# EAGLE board FubarinoMini_v16_SeeedPannel (EAGLE 6.4), part 1 of 2
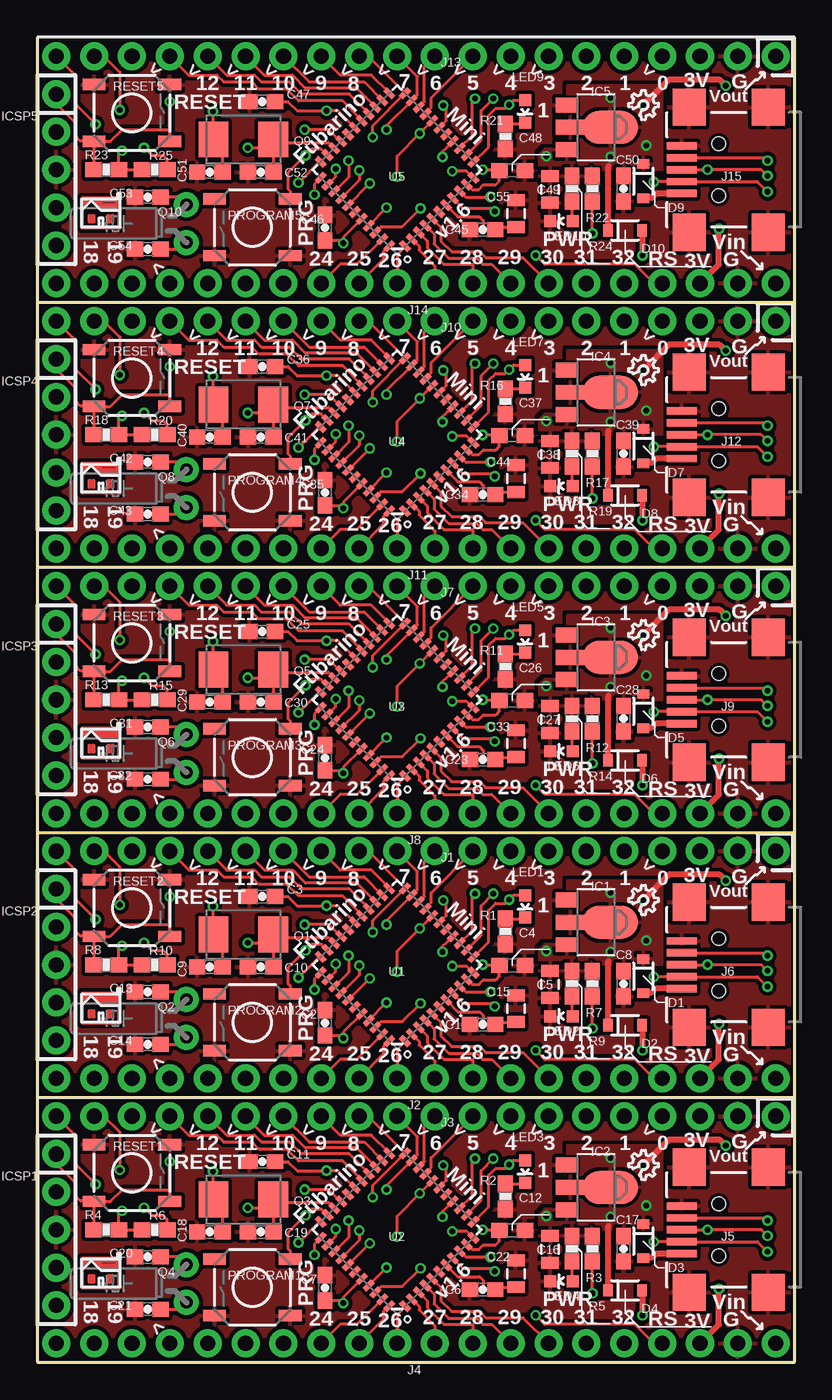
[diagram p0: board, top side]
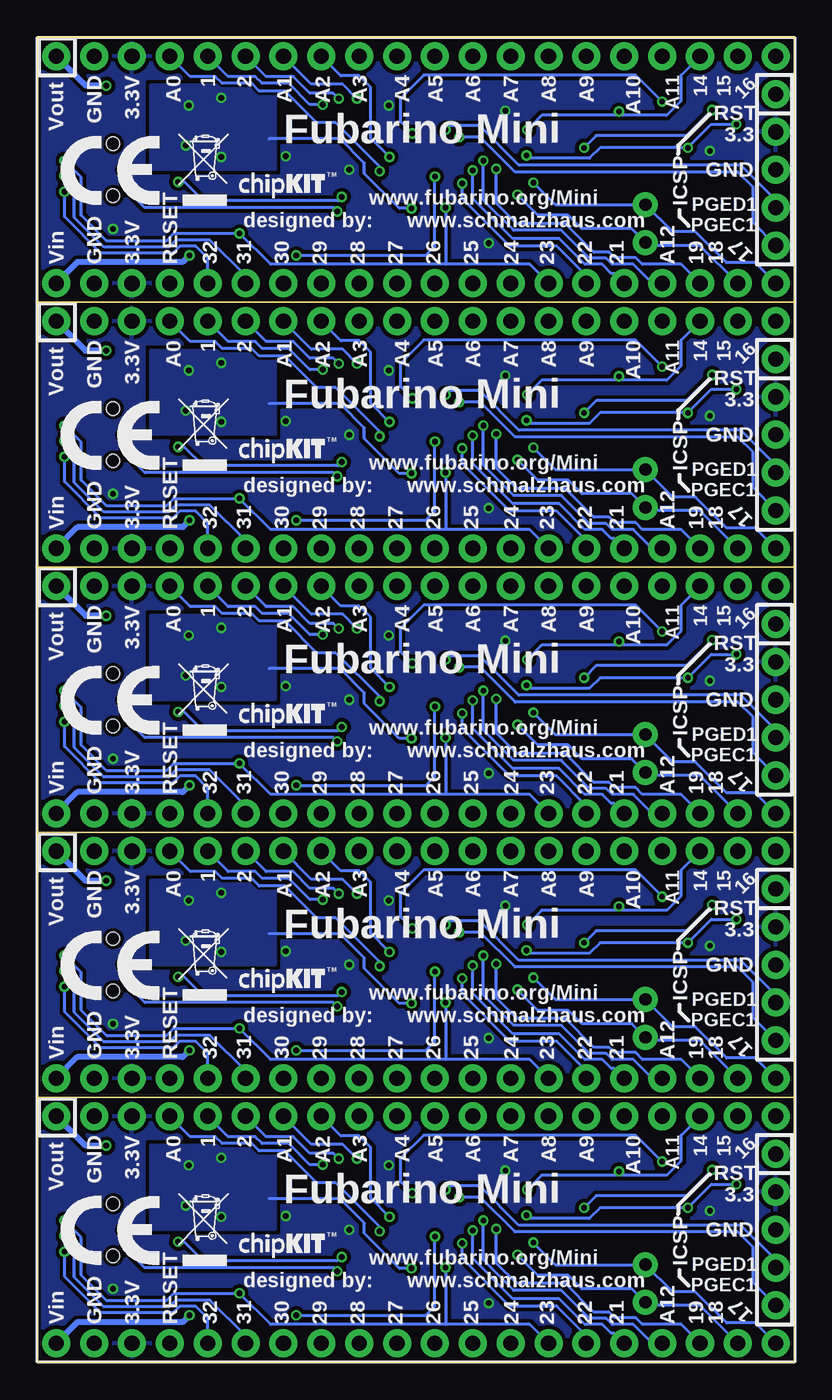
[diagram p1: board, bottom side, seen from below]

Size 50.8 x 88.9 mm. Coordinates in mm from the lower left corner, seen from the top.
Outline: 0,17.78 50.8,17.78
Outline: 50.8,17.78 50.8,0 0,0 0,17.78
Outline: 0,35.56 50.8,35.56
Outline: 50.8,35.56 50.8,17.78
Outline: 50.8,17.78 0,17.78
Outline: 0,17.78 0,35.56
Outline: 0,53.34 50.8,53.34
Outline: 50.8,53.34 50.8,35.56
Outline: 50.8,35.56 0,35.56
Outline: 0,35.56 0,53.34
Outline: 0,71.12 50.8,71.12
Outline: 50.8,71.12 50.8,53.34
Outline: 50.8,53.34 0,53.34
Outline: 0,53.34 0,71.12
Outline: 50.8,71.12 50.8,88.9 0,88.9 0,71.12
Outline: 50.8,71.12 0,71.12
Copper layers (1*16): Top 0.035mm / dielectric 1.5mm / Bottom 0.035mm
Design rules "Fusion_eagle_rule_v1.1": minimum track width 6mil, minimum drill 12mil, track to track 6mil, track to pad 6mil, pad to pad 6mil, via to via 6mil, smd to smd 0mil, copper to edge 10mil, drill to drill 10mil, minimum pad ring 10mil, minimum via ring 6mil, stop-mask expansion 2mil, vias tented up to drill 100mil, thermal gap 10mil

## Footprints (pad centres in the part's own frame; a part is rotated, then mirrored left to right if it is on the bottom)
0603-CAP = smd 1.1 x 1: 1 -0.85,0; 2 0.85,0
0603 = smd 1.1 x 1: 1 -0.85,0; 2 0.85,0
0805 = smd 0.8 x 1.2: 1 -0.9,0; 2 0.9,0
SOD-323 = smd 0.63 x 0.83: 1 -1.15,0; 2 1.15,0
SOT89 = smd 1 x 1.5: 1 -1.499,-1.981; 3 1.499,-1.981 | smd 1 x 2: 2 0,-1.727 | smd 2.2 x 3.7: 2@1 0,0.94
1X05_NOSILK = drill 1.016 pad 1.88: 1 0,0; 2 2.54,0; 3 5.08,0; 4 7.62,0; 5 10.16,0
1X20_NO_PIN1 = drill 1.016 pad 1.88: 1 -24.13,0; 2 -21.59,0; 3 -19.05,0; 4 -16.51,0; 5 -13.97,0; 6 -11.43,0; 7 -8.89,0; 8 -6.35,0; 9 -3.81,0; 10 -1.27,0; 11 1.27,0; 12 3.81,0; 13 6.35,0; 14 8.89,0; 15 11.43,0; 16 13.97,0; 17 16.51,0; 18 19.05,0; 19 21.59,0; 20 24.13,0
USB-MINIB-5PIN-HIROSE-UX60-MB-5ST = smd 0.5 x 2: D+ 0,2.5; D- -0.8,2.5; GND 1.6,2.5; ID 0.8,2.5; VBUS -1.6,2.5 | smd 2.5 x 2.2: MTN1 -4.2,-3.3; MTN2 -4.2,2; MTN3 4.2,-3.3; MTN4 4.2,2 | hole 0.9: -1.75,0; 1.75,0
LED-0603 = smd 0.8 x 0.8: A 0,-0.75; C 0,0.75
TACTILE_SWITCH_SMD = smd 1.524 x 0.762: 1 -2.54,1.905; 2 2.54,1.905; 3 -2.54,-1.905; 4 2.54,-1.905
NX5032_5MM_3.2MM_CRYSTAL = smd 2 x 2.4: 1 -2,0; 2 2,0
TC26H = drill 0.813 pad 1.676: 1 -1.27,0; 2 1.27,0
0603-RES = smd 1.1 x 1: 1 -0.85,0; 2 0.85,0
QFN-44-8X8-NOPAD = smd 0.8 x 0.35: 1 -4,3.25; 2 -4,2.6; 3 -4,1.95; 4 -4,1.3; 5 -4,0.65; 6 -4,0; 7 -4,-0.65; 8 -4,-1.3; 9 -4,-1.95; 10 -4,-2.6; 11 -4,-3.25; 23 4,-3.25; 24 4,-2.6; 25 4,-1.95; 26 4,-1.3; 27 4,-0.65; 28 4,0; 29 4,0.65; 30 4,1.3; 31 4,1.95; 32 4,2.6; 33 4,3.25 | smd 0.35 x 0.8: 12 -3.25,-4; 13 -2.6,-4; 14 -1.95,-4; 15 -1.3,-4; 16 -0.65,-4; 17 0,-4; 18 0.65,-4; 19 1.3,-4; 20 1.95,-4; 21 2.6,-4; 22 3.25,-4; 34 3.25,4; 35 2.6,4; 36 1.95,4; 37 1.3,4; 38 0.65,4; 39 0,4; 40 -0.65,4; 41 -1.3,4; 42 -1.95,4; 43 -2.6,4; 44 -3.25,4

## Placement (x,y rotation side)
C1  0.1uF  [0603-CAP]  29.87,22.66 180 top
C2  0.1uF  [0603-CAP]  19.3,22.78 90 top
C3  0.1uF  [0603-CAP]  15.09,31.24 180 top
C4  0.1uF  [0603]  31.85,26.62 0 top
C5  10uF  [0805]  34.39,25.35 270 top
C6  0.1uF  [0603-CAP]  29.87,4.88 180 top
C7  0.1uF  [0603-CAP]  19.3,5 90 top
C8  1uF  [0603-CAP]  39.32,25.4 270 top
C9  12pF  [0603-CAP]  11.58,26.52 0 top
C10  12pF  [0603-CAP]  14.99,26.52 0 top
C11  0.1uF  [0603-CAP]  15.09,13.46 180 top
C12  0.1uF  [0603]  31.85,8.84 0 top
C13  18pF  [0603-CAP]  7.42,24.84 0 top
C14  18pF  [0603-CAP]  7.42,21.34 0 top
C15  10uF  [0805]  32.11,23.72 90 top
C16  10uF  [0805]  34.39,7.57 270 top
C17  1uF  [0603-CAP]  39.32,7.62 270 top
C18  12pF  [0603-CAP]  11.58,8.74 0 top
C19  12pF  [0603-CAP]  14.99,8.74 0 top
C20  18pF  [0603-CAP]  7.42,7.06 0 top
C21  18pF  [0603-CAP]  7.42,3.56 0 top
C22  10uF  [0805]  32.11,5.94 90 top
C23  0.1uF  [0603-CAP]  29.87,40.44 180 top
C24  0.1uF  [0603-CAP]  19.3,40.56 90 top
C25  0.1uF  [0603-CAP]  15.09,49.02 180 top
C26  0.1uF  [0603]  31.85,44.4 0 top
C27  10uF  [0805]  34.39,43.13 270 top
C28  1uF  [0603-CAP]  39.32,43.18 270 top
C29  12pF  [0603-CAP]  11.58,44.3 0 top
C30  12pF  [0603-CAP]  14.99,44.3 0 top
C31  18pF  [0603-CAP]  7.42,42.62 0 top
C32  18pF  [0603-CAP]  7.42,39.12 0 top
C33  10uF  [0805]  32.11,41.5 90 top
C34  0.1uF  [0603-CAP]  29.87,58.22 180 top
C35  0.1uF  [0603-CAP]  19.3,58.34 90 top
C36  0.1uF  [0603-CAP]  15.09,66.8 180 top
C37  0.1uF  [0603]  31.85,62.18 0 top
C38  10uF  [0805]  34.39,60.91 270 top
C39  1uF  [0603-CAP]  39.32,60.96 270 top
C40  12pF  [0603-CAP]  11.58,62.08 0 top
C41  12pF  [0603-CAP]  14.99,62.08 0 top
C42  18pF  [0603-CAP]  7.42,60.4 0 top
C43  18pF  [0603-CAP]  7.42,56.9 0 top
C44  10uF  [0805]  32.11,59.28 90 top
C45  0.1uF  [0603-CAP]  29.87,76 180 top
C46  0.1uF  [0603-CAP]  19.3,76.12 90 top
C47  0.1uF  [0603-CAP]  15.09,84.58 180 top
C48  0.1uF  [0603]  31.85,79.96 0 top
C49  10uF  [0805]  34.39,78.69 270 top
C50  1uF  [0603-CAP]  39.32,78.74 270 top
C51  12pF  [0603-CAP]  11.58,79.86 0 top
C52  12pF  [0603-CAP]  14.99,79.86 0 top
C53  18pF  [0603-CAP]  7.42,78.18 0 top
C54  18pF  [0603-CAP]  7.42,74.68 0 top
C55  10uF  [0805]  32.11,77.06 90 top
D1  B0540WS-7  [SOD-323]  40.64,25.91 270 top
D2  B0540WS-7  [SOD-323]  39.42,22.61 0 top
D3  B0540WS-7  [SOD-323]  40.64,8.13 270 top
D4  B0540WS-7  [SOD-323]  39.42,4.83 0 top
D5  B0540WS-7  [SOD-323]  40.64,43.69 270 top
D6  B0540WS-7  [SOD-323]  39.42,40.39 0 top
D7  B0540WS-7  [SOD-323]  40.64,61.47 270 top
D8  B0540WS-7  [SOD-323]  39.42,58.17 0 top
D9  B0540WS-7  [SOD-323]  40.64,79.25 270 top
D10  B0540WS-7  [SOD-323]  39.42,75.95 0 top
IC1  MCP1702T-3302E/MB  [SOT89]  37.49,29.51 270 top
IC2  MCP1702T-3302E/MB  [SOT89]  37.49,11.73 270 top
IC3  MCP1702T-3302E/MB  [SOT89]  37.49,47.29 270 top
IC4  MCP1702T-3302E/MB  [SOT89]  37.49,65.07 270 top
IC5  MCP1702T-3302E/MB  [SOT89]  37.49,82.85 270 top
ICSP1  J3  [1X05_NOSILK]  1.27,13.97 270 top
ICSP2  J3  [1X05_NOSILK]  1.27,31.75 270 top
ICSP3  J3  [1X05_NOSILK]  1.27,49.53 270 top
ICSP4  J3  [1X05_NOSILK]  1.27,67.31 270 top
ICSP5  J3  [1X05_NOSILK]  1.27,85.09 270 top
J1  M20  [1X20_NO_PIN1]  25.4,34.29 180 top
J2  M20  [1X20_NO_PIN1]  25.4,19.05 0 top
J3  M20  [1X20_NO_PIN1]  25.4,16.51 180 top
J4  M20  [1X20_NO_PIN1]  25.4,1.27 0 top
J5  USB-5PIN  [USB-MINIB-5PIN-HIROSE-UX60-MB-5ST]  45.72,8.89 90 top
J6  USB-5PIN  [USB-MINIB-5PIN-HIROSE-UX60-MB-5ST]  45.72,26.67 90 top
J7  M20  [1X20_NO_PIN1]  25.4,52.07 180 top
J8  M20  [1X20_NO_PIN1]  25.4,36.83 0 top
J9  USB-5PIN  [USB-MINIB-5PIN-HIROSE-UX60-MB-5ST]  45.72,44.45 90 top
J10  M20  [1X20_NO_PIN1]  25.4,69.85 180 top
J11  M20  [1X20_NO_PIN1]  25.4,54.61 0 top
J12  USB-5PIN  [USB-MINIB-5PIN-HIROSE-UX60-MB-5ST]  45.72,62.23 90 top
J13  M20  [1X20_NO_PIN1]  25.4,87.63 180 top
J14  M20  [1X20_NO_PIN1]  25.4,72.39 0 top
J15  USB-5PIN  [USB-MINIB-5PIN-HIROSE-UX60-MB-5ST]  45.72,80.01 90 top
LED1  GREEN  [LED-0603]  32.72,30.58 180 top
LED2  RED  [LED-0603]  35.15,23.22 90 top
LED3  GREEN  [LED-0603]  32.72,12.8 180 top
LED4  RED  [LED-0603]  35.15,5.44 90 top
LED5  GREEN  [LED-0603]  32.72,48.36 180 top
LED6  RED  [LED-0603]  35.15,41 90 top
LED7  GREEN  [LED-0603]  32.72,66.14 180 top
LED8  RED  [LED-0603]  35.15,58.78 90 top
LED9  GREEN  [LED-0603]  32.72,83.92 180 top
LED10  RED  [LED-0603]  35.15,76.56 90 top
LOGO1  OSHW_LOGO_8MILX0070-NT  [OSHW_8X70_NOTEXT]  39.41,31.16 315 top
LOGO2  OSHW_LOGO_8MILX0070-NT  [OSHW_8X70_NOTEXT]  39.41,13.38 315 top
LOGO3  OSHW_LOGO_8MILX0070-NT  [OSHW_8X70_NOTEXT]  39.41,48.94 315 top
LOGO4  OSHW_LOGO_8MILX0070-NT  [OSHW_8X70_NOTEXT]  39.41,66.72 315 top
LOGO5  OSHW_LOGO_8MILX0070-NT  [OSHW_8X70_NOTEXT]  39.41,84.5 315 top
PROGRAM1  [TACTILE_SWITCH_SMD]  14.43,5.03 180 top
PROGRAM2  [TACTILE_SWITCH_SMD]  14.43,22.81 180 top
PROGRAM3  [TACTILE_SWITCH_SMD]  14.43,40.59 180 top
PROGRAM4  [TACTILE_SWITCH_SMD]  14.43,58.37 180 top
PROGRAM5  [TACTILE_SWITCH_SMD]  14.43,76.15 180 top
Q1  8MHz  [NX5032_5MM_3.2MM_CRYSTAL]  13.82,28.7 0 top
Q2  32.768 KHz  [TC26H]  10.01,23.06 90 top
Q3  8MHz  [NX5032_5MM_3.2MM_CRYSTAL]  13.82,10.92 0 top
Q4  32.768 KHz  [TC26H]  10.01,5.28 90 top
Q5  8MHz  [NX5032_5MM_3.2MM_CRYSTAL]  13.82,46.48 0 top
Q6  32.768 KHz  [TC26H]  10.01,40.84 90 top
Q7  8MHz  [NX5032_5MM_3.2MM_CRYSTAL]  13.82,64.26 0 top
Q8  32.768 KHz  [TC26H]  10.01,58.62 90 top
Q9  8MHz  [NX5032_5MM_3.2MM_CRYSTAL]  13.82,82.04 0 top
Q10  32.768 KHz  [TC26H]  10.01,76.4 90 top
R1  330  [0603-RES]  31.39,28.91 270 top
R2  330  [0603-RES]  31.39,11.13 270 top
R3  10K  [0603-RES]  37.24,7.62 90 top
R4  10K  [0603-RES]  4.62,8.89 180 top
R5  330  [0603-RES]  35.86,7.62 90 top
R6  10K  [0603-RES]  7.87,8.89 0 top
R7  10K  [0603-RES]  37.24,25.4 90 top
R8  10K  [0603-RES]  4.62,26.67 180 top
R9  330  [0603-RES]  35.86,25.4 90 top
R10  10K  [0603-RES]  7.87,26.67 0 top
R11  330  [0603-RES]  31.39,46.69 270 top
R12  10K  [0603-RES]  37.24,43.18 90 top
R13  10K  [0603-RES]  4.62,44.45 180 top
R14  330  [0603-RES]  35.86,43.18 90 top
R15  10K  [0603-RES]  7.87,44.45 0 top
R16  330  [0603-RES]  31.39,64.47 270 top
R17  10K  [0603-RES]  37.24,60.96 90 top
R18  10K  [0603-RES]  4.62,62.23 180 top
R19  330  [0603-RES]  35.86,60.96 90 top
R20  10K  [0603-RES]  7.87,62.23 0 top
R21  330  [0603-RES]  31.39,82.25 270 top
R22  10K  [0603-RES]  37.24,78.74 90 top
R23  10K  [0603-RES]  4.62,80.01 180 top
R24  330  [0603-RES]  35.86,78.74 90 top
R25  10K  [0603-RES]  7.87,80.01 0 top
RESET1  [TACTILE_SWITCH_SMD]  6.35,12.7 0 top
RESET2  [TACTILE_SWITCH_SMD]  6.35,30.48 0 top
RESET3  [TACTILE_SWITCH_SMD]  6.35,48.26 0 top
RESET4  [TACTILE_SWITCH_SMD]  6.35,66.04 0 top
RESET5  [TACTILE_SWITCH_SMD]  6.35,83.82 0 top
U1  PIC32MX250F128D_44VTLA_44  [QFN-44-8X8-NOPAD]  24.13,26.67 135 top
U2  PIC32MX250F128D_44VTLA_44  [QFN-44-8X8-NOPAD]  24.13,8.89 135 top
U3  PIC32MX250F128D_44VTLA_44  [QFN-44-8X8-NOPAD]  24.13,44.45 135 top
U4  PIC32MX250F128D_44VTLA_44  [QFN-44-8X8-NOPAD]  24.13,62.23 135 top
U5  PIC32MX250F128D_44VTLA_44  [QFN-44-8X8-NOPAD]  24.13,80.01 135 top
U$1  SCHMALZHAUSSCHMALZHAUS_SMALL  [SCHMALZHAUS_SMALL]  4.27,22.81 0 top
U$2  CE_MARK5MM  [CE_5MM]  45.9,26.68 0 bottom
U$3  ROSH_GARBAGE  [ROHS_GARBAGE_5MM]  41.3,24.27 0 bottom
U$4  CHIPKIT2MM  [CHIPKIT_2MM]  37.39,24.72 0 bottom
U$5  SCHMALZHAUSSCHMALZHAUS_SMALL  [SCHMALZHAUS_SMALL]  4.27,5.03 0 top
U$6  CE_MARK5MM  [CE_5MM]  45.9,8.9 0 bottom
U$7  ROSH_GARBAGE  [ROHS_GARBAGE_5MM]  41.3,6.49 0 bottom
U$8  CHIPKIT2MM  [CHIPKIT_2MM]  37.39,6.94 0 bottom
U$9  SCHMALZHAUSSCHMALZHAUS_SMALL  [SCHMALZHAUS_SMALL]  4.27,40.59 0 top
U$10  CE_MARK5MM  [CE_5MM]  45.9,44.46 0 bottom
U$11  ROSH_GARBAGE  [ROHS_GARBAGE_5MM]  41.3,42.05 0 bottom
U$12  CHIPKIT2MM  [CHIPKIT_2MM]  37.39,42.5 0 bottom
U$13  SCHMALZHAUSSCHMALZHAUS_SMALL  [SCHMALZHAUS_SMALL]  4.27,58.37 0 top
U$14  CE_MARK5MM  [CE_5MM]  45.9,62.24 0 bottom
U$15  ROSH_GARBAGE  [ROHS_GARBAGE_5MM]  41.3,59.83 0 bottom
U$16  CHIPKIT2MM  [CHIPKIT_2MM]  37.39,60.28 0 bottom
U$17  SCHMALZHAUSSCHMALZHAUS_SMALL  [SCHMALZHAUS_SMALL]  4.27,76.15 0 top
U$18  CE_MARK5MM  [CE_5MM]  45.9,80.02 0 bottom
U$19  ROSH_GARBAGE  [ROHS_GARBAGE_5MM]  41.3,77.61 0 bottom
U$20  CHIPKIT2MM  [CHIPKIT_2MM]  37.39,78.06 0 bottom

## Library data of the parts
C1-C3 C6-C11 C13 C14 C17-C21 C23-C25 C28-C32 C34-C36 C39-C43 C45-C47 C50-C54 D1-D10 LED1-LED10 R1-R25 = SparkFun
C4 C5 C12 C16 C26 C27 C37 C38 C48 C49 PROGRAM1-PROGRAM5 RESET1-RESET5 = SparkFun02-20-08
C15 C22 C33 C44 C55 ICSP1-ICSP5 J1-J15 Q1-Q10 U1-U5 U$1 U$5 U$9 U$13 U$17 = SchmalzHaus
IC1-IC5 = linear
LOGO1-LOGO5 = OSHW
U$2-U$4 U$6-U$8 U$10-U$12 U$14-U$16 U$18-U$20 = SchmalzHausPublic

## Nets
3.3V1: C7.1 C11.1 C12.1 C16.1 IC2.3 ICSP1.2 J3.3 J4.18 R3.2 R4.1 R5.2 R6.1 U2.10 U2.17 U2.28 U2.40
3.3V2: C2.1 C3.1 C4.1 C5.1 IC1.3 ICSP2.2 J1.3 J2.18 R7.2 R8.1 R9.2 R10.1 U1.10 U1.17 U1.28 U1.40
3.3V3: C24.1 C25.1 C26.1 C27.1 IC3.3 ICSP3.2 J7.3 J8.18 R12.2 R13.1 R14.2 R15.1 U3.10 U3.17 U3.28 U3.40
3.3V4: C35.1 C36.1 C37.1 C38.1 IC4.3 ICSP4.2 J10.3 J11.18 R17.2 R18.1 R19.2 R20.1 U4.10 U4.17 U4.28 U4.40
3.3V5: C46.1 C47.1 C48.1 C49.1 IC5.3 ICSP5.2 J13.3 J14.18 R22.2 R23.1 R24.2 R25.1 U5.10 U5.17 U5.28 U5.40
5V1: C17.1 D3.1 D4.1 IC2.2 IC2.2@1 J3.1 U2.42
5V2: C8.1 D1.1 D2.1 IC1.2 IC1.2@1 J1.1 U1.42
5V3: C28.1 D5.1 D6.1 IC3.2 IC3.2@1 J7.1 U3.42
5V4: C39.1 D7.1 D8.1 IC4.2 IC4.2@1 J10.1 U4.42
5V5: C50.1 D9.1 D10.1 IC5.2 IC5.2@1 J13.1 U5.42
!MCLR!1: ICSP1.1 J4.17 R4.2 RESET1.3 RESET1.4 U2.18
!MCLR!2: ICSP2.1 J2.17 R8.2 RESET2.3 RESET2.4 U1.18
!MCLR!3: ICSP3.1 J8.17 R13.2 RESET3.3 RESET3.4 U3.18
!MCLR!4: ICSP4.1 J11.17 R18.2 RESET4.3 RESET4.4 U4.18
!MCLR!5: ICSP5.1 J14.17 R23.2 RESET5.3 RESET5.4 U5.18
D+/RB1: J4.15 J5.D+ U2.8
D+/RB2: J2.15 J6.D+ U1.8
D+/RB3: J8.15 J9.D+ U3.8
D+/RB4: J11.15 J12.D+ U4.8
D+/RB5: J14.15 J15.D+ U5.8
D-/RB1: J4.16 J5.D- U2.9
D-/RB2: J2.16 J6.D- U1.9
D-/RB3: J8.16 J9.D- U3.9
D-/RB4: J11.16 J12.D- U4.9
D-/RB5: J14.16 J15.D- U5.9
GND1: C6.2 C7.2 C11.2 C12.2 C16.2 C17.2 C18.1 C19.1 C20.1 C21.1 C22.2 IC2.1 ICSP1.3 J3.2 J4.19 J5.GND J5.MTN1 J5.MTN2 J5.MTN3 J5.MTN4 LED4.C PROGRAM1.1 PROGRAM1.2 R2.2 RESET1.1 RESET1.2 U2.6 U2.16 U2.29 U2.39
GND2: C1.2 C2.2 C3.2 C4.2 C5.2 C8.2 C9.1 C10.1 C13.1 C14.1 C15.2 IC1.1 ICSP2.3 J1.2 J2.19 J6.GND J6.MTN1 J6.MTN2 J6.MTN3 J6.MTN4 LED2.C PROGRAM2.1 PROGRAM2.2 R1.2 RESET2.1 RESET2.2 U1.6 U1.16 U1.29 U1.39
GND3: C23.2 C24.2 C25.2 C26.2 C27.2 C28.2 C29.1 C30.1 C31.1 C32.1 C33.2 IC3.1 ICSP3.3 J7.2 J8.19 J9.GND J9.MTN1 J9.MTN2 J9.MTN3 J9.MTN4 LED6.C PROGRAM3.1 PROGRAM3.2 R11.2 RESET3.1 RESET3.2 U3.6 U3.16 U3.29 U3.39
GND4: C34.2 C35.2 C36.2 C37.2 C38.2 C39.2 C40.1 C41.1 C42.1 C43.1 C44.2 IC4.1 ICSP4.3 J10.2 J11.19 J12.GND J12.MTN1 J12.MTN2 J12.MTN3 J12.MTN4 LED8.C PROGRAM4.1 PROGRAM4.2 R16.2 RESET4.1 RESET4.2 U4.6 U4.16 U4.29 U4.39
GND5: C45.2 C46.2 C47.2 C48.2 C49.2 C50.2 C51.1 C52.1 C53.1 C54.1 C55.2 IC5.1 ICSP5.3 J13.2 J14.19 J15.GND J15.MTN1 J15.MTN2 J15.MTN3 J15.MTN4 LED10.C PROGRAM5.1 PROGRAM5.2 R21.2 RESET5.1 RESET5.2 U5.6 U5.16 U5.29 U5.39
N$1: LED3.C R2.1
N$2: LED4.A R5.1
N$3: LED1.C R1.1
N$4: LED2.A R9.1
N$5: LED5.C R11.1
N$6: LED6.A R14.1
N$7: LED7.C R16.1
N$8: LED8.A R19.1
N$9: LED9.C R21.1
N$10: LED10.A R24.1
RA1: C10.2 J1.19 Q1.2 U1.31
RA2: C9.2 J1.18 Q1.1 U1.30
RA3: J2.3 U1.35
RA4: J1.20 PROGRAM2.3 R10.2 U1.32
RA5: C19.2 J3.19 Q3.2 U2.31
RA6: C18.2 J3.18 Q3.1 U2.30
RA7: J1.5 LED1.A U1.12
RA8: J1.6 U1.13
RA9: J1.9 U1.19
RA10: J1.10 U1.20
RA11: J4.3 U2.35
RA12: J3.20 PROGRAM1.3 R6.2 U2.32
RA13: J3.5 LED3.A U2.12
RA14: J3.6 U2.13
RA15: J3.9 U2.19
RA16: J3.10 U2.20
RA17: C21.2 J4.2 Q4.1 U2.34
RA18: C14.2 J2.2 Q2.1 U1.34
RA19: C30.2 J7.19 Q5.2 U3.31
RA20: C29.2 J7.18 Q5.1 U3.30
RA21: J8.3 U3.35
RA22: J7.20 PROGRAM3.3 R15.2 U3.32
RA23: J7.5 LED5.A U3.12
RA24: J7.6 U3.13
RA25: J7.9 U3.19
RA26: J7.10 U3.20
RA27: C32.2 J8.2 Q6.1 U3.34
RA28: C41.2 J10.19 Q7.2 U4.31
RA29: C40.2 J10.18 Q7.1 U4.30
RA30: J11.3 U4.35
RA31: J10.20 PROGRAM4.3 R20.2 U4.32
RA32: J10.5 LED7.A U4.12
RA33: J10.6 U4.13
RA34: J10.9 U4.19
RA35: J10.10 U4.20
RA36: C43.2 J11.2 Q8.1 U4.34
RA37: C52.2 J13.19 Q9.2 U5.31
RA38: C51.2 J13.18 Q9.1 U5.30
RA39: J14.3 U5.35
RA40: J13.20 PROGRAM5.3 R25.2 U5.32
RA41: J13.5 LED9.A U5.12
RA42: J13.6 U5.13
RA43: J13.9 U5.19
RA44: J13.10 U5.20
RA45: C54.2 J14.2 Q10.1 U5.34
RB1: J2.9 U1.44
RB2: J2.10 U1.1
RB3: J1.4 U1.11
RB4: J1.7 U1.14
RB5: J4.9 U2.44
RB6: J4.10 U2.1
RB7: J1.8 U1.15
RB8: ICSP2.5 J1.12 U1.22
RB9: ICSP2.4 J1.11 U1.21
RB10: J3.4 U2.11
RB11: J3.7 U2.14
RB12: J3.8 U2.15
RB13: J2.8 U1.43
RB14: J1.14 U1.24
RB15: J1.13 U1.23
RB16: ICSP1.5 J3.12 U2.22
RB17: ICSP1.4 J3.11 U2.21
RB18: J4.8 U2.43
RB19: J3.14 U2.24
RB20: J3.13 U2.23
RB21: C20.2 J4.1 Q4.2 U2.33
RB22: C13.2 J2.1 Q2.2 U1.33
RB23: J8.9 U3.44
RB24: J8.10 U3.1
RB25: J7.4 U3.11
RB26: J7.7 U3.14
RB27: J7.8 U3.15
RB28: ICSP3.5 J7.12 U3.22
RB29: ICSP3.4 J7.11 U3.21
RB30: J8.8 U3.43
RB31: J7.14 U3.24
RB32: J7.13 U3.23
RB33: C31.2 J8.1 Q6.2 U3.33
RB34: J11.9 U4.44
RB35: J11.10 U4.1
RB36: J10.4 U4.11
RB37: J10.7 U4.14
RB38: J10.8 U4.15
RB39: ICSP4.5 J10.12 U4.22
RB40: ICSP4.4 J10.11 U4.21
RB41: J11.8 U4.43
RB42: J10.14 U4.24
RB43: J10.13 U4.23
RB44: C42.2 J11.1 Q8.2 U4.33
RB45: J14.9 U5.44
RB46: J14.10 U5.1
RB47: J13.4 U5.11
RB48: J13.7 U5.14
RB49: J13.8 U5.15
RB50: ICSP5.5 J13.12 U5.22
RB51: ICSP5.4 J13.11 U5.21
RB52: J14.8 U5.43
RB53: J13.14 U5.24
RB54: J13.13 U5.23
RB55: C53.2 J14.1 Q10.2 U5.33
RC1: J2.6 U1.38
RC2: J2.5 U1.37
RC3: J2.4 U1.36
RC4: J1.17 U1.27
RC5: J1.16 U1.26
RC6: J1.15 U1.25
RC7: J2.11 U1.2
RC8: J2.12 U1.3
RC9: J2.13 U1.4
RC10: J4.6 U2.38
RC11: J4.5 U2.37
RC12: J4.4 U2.36
RC13: J3.17 U2.27
RC14: J3.16 U2.26
RC15: J3.15 U2.25
RC16: J4.11 U2.2
RC17: J4.12 U2.3
RC18: J4.13 U2.4
RC19: J4.14 U2.5
RC20: J2.14 U1.5
RC21: J8.6 U3.38
RC22: J8.5 U3.37
RC23: J8.4 U3.36
RC24: J7.17 U3.27
RC25: J7.16 U3.26
RC26: J7.15 U3.25
RC27: J8.11 U3.2
RC28: J8.12 U3.3
RC29: J8.13 U3.4
RC30: J8.14 U3.5
RC31: J11.6 U4.38
RC32: J11.5 U4.37
RC33: J11.4 U4.36
RC34: J10.17 U4.27
RC35: J10.16 U4.26
RC36: J10.15 U4.25
RC37: J11.11 U4.2
RC38: J11.12 U4.3
RC39: J11.13 U4.4
RC40: J11.14 U4.5
RC41: J14.6 U5.38
RC42: J14.5 U5.37
RC43: J14.4 U5.36
RC44: J13.17 U5.27
RC45: J13.16 U5.26
RC46: J13.15 U5.25
RC47: J14.11 U5.2
RC48: J14.12 U5.3
RC49: J14.13 U5.4
RC50: J14.14 U5.5
USBID/RB1: J4.7 J5.ID R3.1 U2.41
USBID/RB2: J2.7 J6.ID R7.1 U1.41
USBID/RB3: J8.7 J9.ID R12.1 U3.41
USBID/RB4: J11.7 J12.ID R17.1 U4.41
USBID/RB5: J14.7 J15.ID R22.1 U5.41
VBUS1: D3.2 J5.VBUS
VBUS2: D1.2 J6.VBUS
VBUS3: D5.2 J9.VBUS
VBUS4: D7.2 J12.VBUS
VBUS5: D9.2 J15.VBUS
VCAP1: C6.1 C22.1 U2.7
VCAP2: C1.1 C15.1 U1.7
VCAP3: C23.1 C33.1 U3.7
VCAP4: C34.1 C44.1 U4.7
VCAP5: C45.1 C55.1 U5.7
VIN1: D4.2 J4.20
VIN2: D2.2 J2.20
VIN3: D6.2 J8.20
VIN4: D8.2 J11.20
VIN5: D10.2 J14.20